# EAGLE board DRV8824%20v2.brd (2) (EAGLE 7.5.0)
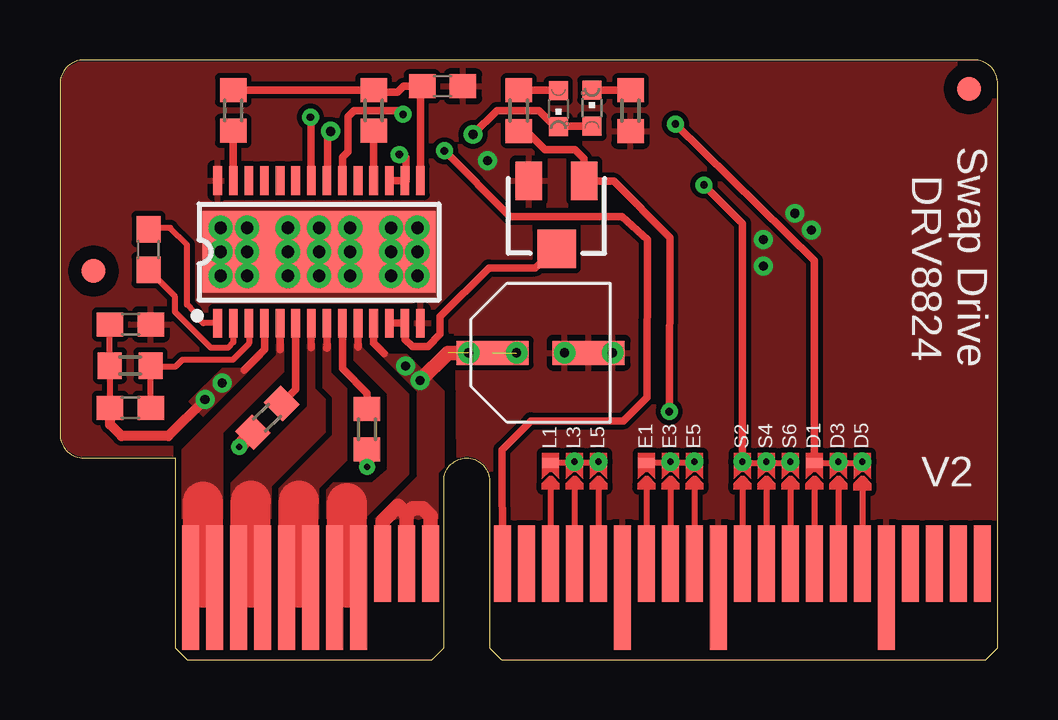
[diagram p0: board, top side]
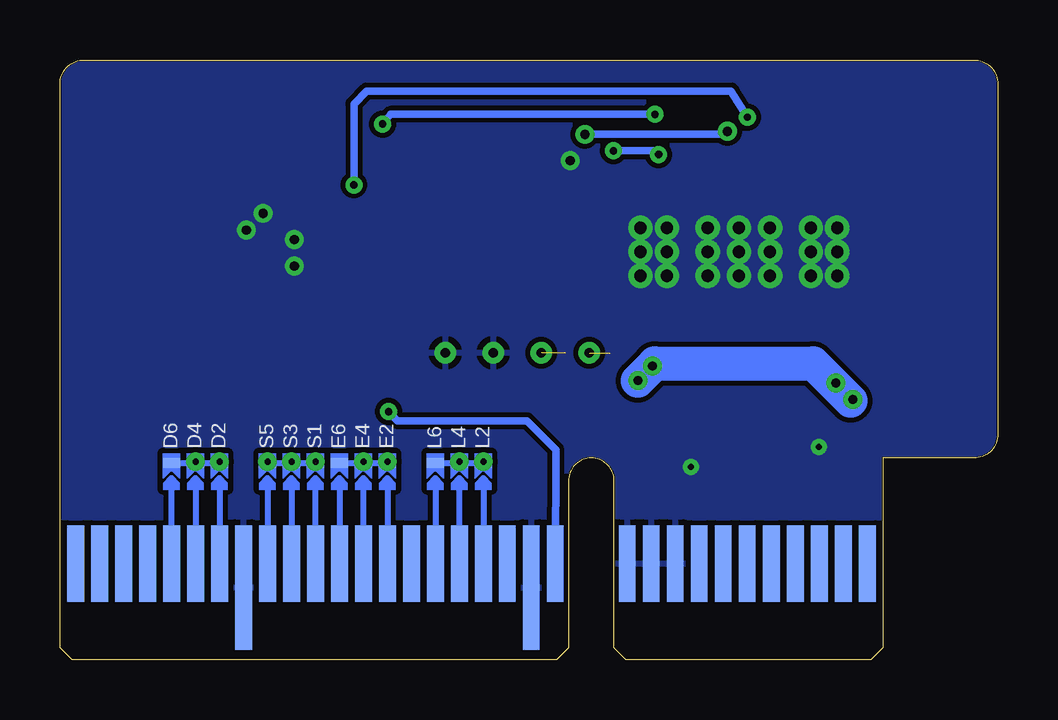
[diagram p1: board, bottom side, seen from below]

Size 39.1 x 25 mm. Coordinates in mm from the lower left corner, seen from the top.
Outline: 39.1,8.4 39.1,24 arc90 38.1,25 1,25 arc90 0,24 0,9.4 arc90 1,8.4 4.8,8.4
Copper layers (1*16): Top 0.035mm / dielectric 1.5mm / Bottom 0.035mm
Design rules "default *": minimum track width 10mil, minimum drill 24mil, track to track 8mil, track to pad 8mil, pad to pad 8mil, via to via 8mil, smd to smd 8mil, copper to edge 2mil, drill to drill 8mil, minimum pad ring 10mil, minimum via ring 8mil, stop-mask expansion 4mil, vias tented up to drill 30mil, thermal gap 10mil

## Footprints (pad centres in the part's own frame; a part is rotated, then mirrored left to right if it is on the bottom)
CHIPLED_0603 = smd 0.8 x 0.8: A 0,-0.75; C 0,0.75
C0603 = smd 1.1 x 1: 1 -0.85,0; 2 0.85,0
HTSSOP-28 = smd 0.36 x 1.19: 1 -4.225,-2.97; 2 -3.575,-2.97; 3 -2.925,-2.97; 4 -2.275,-2.97; 5 -1.625,-2.97; 6 -0.975,-2.97; 7 -0.325,-2.97; 8 0.325,-2.97; 9 0.975,-2.97; 10 1.625,-2.97; 11 2.275,-2.97; 12 2.925,-2.97; 13 3.575,-2.97; 14 4.225,-2.97; 15 4.225,2.97; 16 3.575,2.97; 17 2.925,2.97; 18 2.275,2.97; 19 1.625,2.97; 20 0.975,2.97; 21 0.325,2.97; 22 -0.325,2.97; 23 -0.975,2.97; 24 -1.625,2.97; 25 -2.275,2.97; 26 -2.925,2.97; 27 -3.575,2.97; 28 -4.225,2.97 | drill 0.508: GND@10 -4.1,1; GND@11 -4.1,0; GND@12 -4.1,-1; GND@13 -3,-1; GND@14 -3,0; GND@15 -3,1; GND@16 -1.3,1; GND@17 -1.3,0; GND@18 -1.3,-1; GND@19 0,-1; GND@20 0,0; GND@21 0,1; GND@22 1.3,1; GND@23 1.3,0; GND@24 1.3,-1; GND@25 3,-1; GND@26 3,0; GND@27 3,1; GND@28 4.1,1; GND@29 4.1,0; GND@30 4.1,-1 | smd 9.7 x 3.4: GND@PAD 0,0
R0603 = smd 1 x 1.1: 1 -0.85,0; 2 0.85,0
TRIMPOT-3MM-2 = smd 1.092 x 1.6: 1 -1.155,-1.421; 3 1.155,-1.421 | smd 1.6 x 1.6: 2 0,1.421
PCIE_64_SMART_BOARD = smd 0.7 x 3.2 bottom: GND@1 8.65,4; GND@2 9.65,4; GND@3 10.65,4; P$1 0.65,4; P$2 1.65,4; P$3 2.65,4; P$4 3.65,4; P$5 4.65,4; P$6 5.65,4; P$7 6.65,4; P$8 7.65,4; P$12 13.65,4; P$14 15.65,4; P$15 16.65,4; P$16 17.65,4; P$17 18.65,4; P$18 19.65,4; P$19 20.65,4; P$20 21.65,4; P$21 22.65,4; P$22 23.65,4; P$23 24.65,4; P$24 25.65,4; P$26 27.65,4; P$27 28.65,4; P$28 29.65,4; P$29 30.65,4; P$30 31.65,4; P$31 32.65,4; P$32 33.65,4 | smd 0.7 x 5.2 bottom: P$13 14.65,3; P$25 26.65,3 | smd 0.7 x 0.4 bottom: P$15@1 16.65,8.2; P$16@1 17.65,8.2; P$17@1 18.65,8.2; P$19@1 20.65,8.2; P$20@1 21.65,8.2; P$21@1 22.65,8.2; P$22@1 23.65,8.2; P$23@1 24.65,8.2; P$24@1 25.65,8.2; P$26@1 27.65,8.2; P$27@1 28.65,8.2; P$28@1 29.65,8.2 | smd 0.7 x 5.2: P$33 0.65,3; P$34 1.65,3; P$35 2.65,3; P$36 3.65,3; P$37 4.65,3; P$38 5.65,3; P$39 6.65,3; P$40 7.65,3; P$49 18.65,3; P$53 22.65,3; P$60 29.65,3 | drill 0.254 pad 0.305: P$41 21.65,8.25; P$42 17.65,8.25; P$43 16.65,8.25; P$65 20.65,8.25; P$66 23.65,8.25; P$67 24.65,8.25; P$68 27.65,8.25; P$69 28.65,8.25; P$70 25.65,8.25 | smd 0.7 x 3.2: P$44 13.65,4; P$45 14.65,4; P$46 15.65,4; P$47 16.65,4; P$48 17.65,4; P$50 19.65,4; P$51 20.65,4; P$52 21.65,4; P$54 23.65,4; P$55 24.65,4; P$56 25.65,4; P$57 26.65,4; P$58 27.65,4; P$59 28.65,4; P$61 30.65,4; P$62 31.65,4; P$63 32.65,4; P$64 33.65,4; VCC@1 8.65,4; VCC@2 9.65,4; VCC@3 10.65,4 | smd 0.7 x 0.4: P$46@1 15.65,8.2; P$47@1 16.65,8.2; P$48@1 17.65,8.2; P$50@1 19.65,8.2; P$51@1 20.65,8.2; P$52@1 21.65,8.2; P$54@1 23.65,8.2; P$55@1 24.65,8.2; P$56@1 25.65,8.2; P$57@1 26.65,8.2; P$58@1 27.65,8.2; P$59@1 28.65,8.2
EEEFK0J220R = smd 1 x 3: GND@1 0,-2; P$1 0,2 | drill 0.381: GND@2 0,-1; GND@3 0,-3; P$3 0,1; P$5 0,3
FIDUCIAL_1MM = smd 1 x 1: 1 0,0

## Placement (x,y rotation side)
BLU1  [CHIPLED_0603]  22.17,22.99 0 top
C3  4.7uf  [C0603]  15.95,23.9 0 top
C9  .01uf  [C0603]  3.69,17.09 90 top
C10  .1uf  [C0603]  2.94,13.98 0 top
C11  .1uf  [C0603]  2.94,10.5 0 top
DRV8824  DRV8824  [HTSSOP-28]  10.8,17 0 top
GRN1  [CHIPLED_0603]  20.78,22.96 180 top
R1  460  [R0603]  19.13,22.89 270 top
R2  10k  [R0603]  13.08,22.9 90 top
R3  10k  [R0603]  7.22,22.9 90 top
R4  .33 ohm  [R0603]  8.64,10.08 45 top
R5  .33ohm  [R0603]  12.8,9.61 90 top
R6  1m  [R0603]  2.93,12.26 0 top
R9  460  [R0603]  23.79,22.89 270 top
R22  10K  [TRIMPOT-3MM-2]  20.7,18.54 180 top
U$2  [PCIE_64_SMART_BOARD]  4.8,0 0 top
U$7  EEEFK0J220R  [EEEFK0J220R]  20.04,12.79 90 top
U$9  FIDUCIAL  [FIDUCIAL_1MM]  1.4,16.2 0 top
U$12  FIDUCIAL  [FIDUCIAL_1MM]  37.9,23.8 0 top

## Library data of the parts
BLU1 C3 C9-C11 GRN1 R1-R6 R9 U$9 U$12 = adafruit
DRV8824 U$2 U$7 = PocketNC
R22 = SparkFun-Electromechanical

## Nets
3.3V: C3.1 DRV8824.15 R2.2 R3.2
3V: R1.2 R22.1 U$2.P$12
5V: DRV8824.16 DRV8824.17 U$2.P$44
DIR: DRV8824.20 U$2.P$57@1
ENBL: BLU1.A DRV8824.21 GRN1.C
ENBL-IN: U$2.P$50@1
GND: C3.2 C10.2 DRV8824.14 DRV8824.28 DRV8824.GND@10 DRV8824.GND@11 DRV8824.GND@12 DRV8824.GND@13 DRV8824.GND@14 DRV8824.GND@15 DRV8824.GND@16 DRV8824.GND@17 DRV8824.GND@18 DRV8824.GND@19 DRV8824.GND@20 DRV8824.GND@21 DRV8824.GND@22 DRV8824.GND@23 DRV8824.GND@24 DRV8824.GND@25 DRV8824.GND@26 DRV8824.GND@27 DRV8824.GND@28 DRV8824.GND@29 DRV8824.GND@30 DRV8824.GND@PAD R4.1 R5.1 R9.2 R22.3 U$2.GND@1 U$2.GND@2 U$2.GND@3 U$2.P$13 U$2.P$25 U$2.P$49 U$2.P$53 U$2.P$60 U$7.GND@1 U$7.GND@2 U$7.GND@3
N$1: C9.2 DRV8824.1
N$2: C9.1 DRV8824.2
N$3: DRV8824.18 R2.1
N$4: DRV8824.9 R5.2
N$6: DRV8824.6 R4.2
N$9: BLU1.C R9.1
N$10: GRN1.A R1.1
N$12: DRV8824.12 DRV8824.13 R22.2
N$16: DRV8824.27 R3.1
PHASE1: DRV8824.5 U$2.P$33 U$2.P$34
PHASE2: DRV8824.7 U$2.P$35 U$2.P$36
PHASE3: DRV8824.8 U$2.P$37 U$2.P$38
PHASE4: DRV8824.10 U$2.P$39 U$2.P$40
STEP: DRV8824.22 U$2.P$22@1
VCC: C10.1 C11.1 DRV8824.4 DRV8824.11 R6.1 U$2.VCC@1 U$2.VCC@2 U$2.VCC@3 U$7.P$1 U$7.P$3 U$7.P$5
VCP: C11.2 DRV8824.3 R6.2

## Tracks (layer width: path | path; a pad name or v marks a point on that pad's centre or on a via)
3.3V
  Top 0.305: DRV8824.15 15.02,23.64 C3.1 14.32,23.9 14.07,23.65 13.18,23.65 R2.2 | 13.18,23.64 R2.2 | R2.2 R3.2
3V  (via drill 0.3)
  Top 0.305: 19.02,22.04 R1.2 19.44,22.04 20.22,21.26 21.46,21.26 21.84,20.88 21.84,19.98 R22.1 21.88,19.94 23.09,19.94 25.43,17.6 v25.4,10.34
  Bottom 0.305: U$2.P$12 18.43,8.75 19.63,9.96 25.02,9.96 v25.4,10.34
5V  (via drill 0.3)
  Top 0.305: DRV8824.17 DRV8824.16 14.43,19.92 14.43,20.93 14.3,21.06 v14.15,21.06 | U$2.P$44 18.43,8.75 19.63,9.96 23.49,9.96 24.46,10.92 24.48,17.5 23.42,18.47 18.77,18.47 v16.03,21.21
  Bottom 0.305: v16.03,21.21 14.3,21.21 v14.15,21.06
DIR  (via drill 0.3)
  Top 0.305: DRV8824.20 11.77,20.95 12.01,21.18 12.01,22.63 12.27,22.89 14.05,22.89 v14.3,22.73 | v25.65,22.33 31.45,16.63 U$2.P$57@1
  Bottom 0.305: v14.3,22.73 25.32,22.73 v25.65,22.33
ENBL  (via drill 0.38)
  Top 0.305: BLU1.A 20.78,22.24 GRN1.C 20.64,22.21 19.96,22.89 18.21,22.89 v17.22,21.9 | DRV8824.21 11.15,19.89 11.15,21.9 v11.28,22.02
  Bottom 0.305: v17.22,21.9 11.48,21.9 v11.28,22.02
GND  (via drill 0.25, 0.38)
  Top 0.305: 8.03,9.47 R4.1
  Top 0.635: v7.47,8.87 8.03,9.47 | v12.8,8.03 R5.1
  other vias: 17.83,20.8 29.33,17.5 29.33,16.4 30.63,18.6 31.33,17.9
  pour Bottom: 0,2.9 39.1,3 39.1,25 0,24.9
  pour Top: 4.6,8.4 0,8.4 0,25 39.1,25 39.13,5.19 16.68,5.09 16.68,5.77 16.65,7.5 16.63,10.89 16.56,13.67 8.9,13.7 6.52,13.68 6.57,13.21 4.6,11.31
N$1
  Top 0.254: DRV8824.1 5.97,14.03 5.6,14.4 5.6,14.5 5.3,14.8 5.3,17.3 4.6,18 3.75,18 C9.2
N$2
  Top 0.254: DRV8824.2 7.22,13.22 7,13 6.3,13 4.8,14.5 4.8,15.13 C9.1
N$3
  Top 0.305: DRV8824.18 R2.1
N$4
  Top 0.305: DRV8824.9 11.77,12.13 12.8,11.1 R5.2
N$6
  Top 0.305: DRV8824.6 9.82,11.27 R4.2
N$9
  Top 0.305: BLU1.C R9.1
N$10
  Top 0.305: R1.1 20.78,23.74 GRN1.A
N$12
  Top 0.305: DRV8824.12 DRV8824.13 14.38,13.34 14.71,13.06 15.34,13.06 15.85,13.56 15.85,14.3 17.88,16.33 19.81,16.33 R22.2
N$16
  Top 0.305: DRV8824.27 R3.1 | R3.1
PHASE1
  Top 0.305: DRV8824.5 9.18,12.94 9.17,12.93 | U$2.P$34 5.97,3
  Top 0.61: U$2.P$33 U$2.P$34
  Top 1.676: 5.97,3 5.97,6.58
  pour Top: 9.02,13.18 9.02,12.67 5.08,8.74 5.08,5.79 6.81,5.79 6.81,9.47 9.35,12.01 9.35,13.18
PHASE2
  Top 0.305: DRV8824.7 10.47,13.02 10.46,13.01 | U$2.P$36 7.95,3
  Top 0.61: U$2.P$35 7.95,3
  Top 1.676: 7.95,3 7.95,6.63
  pour Top: 10.31,13.18 10.31,10.54 7.11,7.34 7.11,5.77 8.81,5.77 8.81,7.24 11.07,9.5 11.07,10.85 10.64,11.28 10.64,13.18
PHASE3
  Top 0.305: DRV8824.8 11.12,12.98 | U$2.P$38 9.96,3
  Top 0.61: U$2.P$37 9.96,3
  Top 1.676: 9.96,3 9.96,6.63
  pour Top: 10.95,13.18 10.95,11.35 11.35,10.95 11.35,9.35 9.12,7.11 9.12,5.79 10.79,5.79 10.79,7.16 11.96,8.33 11.96,11.28 11.3,11.94 11.3,13.18
PHASE4
  Top 0.305: DRV8824.10 12.43,13.04 12.42,13.03 | U$2.P$40 11.96,3
  Top 0.61: U$2.P$39 11.96,3
  Top 1.676: 11.96,3 11.96,6.53
  pour Top: 12.24,13.21 12.24,12.5 13.64,11.1 13.64,7.9 13.03,7.39 11.38,7.37 11.1,7.06 11.1,5.79 12.8,5.79 12.8,5.99 14.55,7.75 14.55,11.05 12.6,13 12.6,13.21
STEP  (via drill 0.3)  (1 unrouted)
  Top 0.305: DRV8824.22 10.47,22.55 v10.44,22.62 | v26.85,19.79 28.45,18.18 U$2.P$22@1
  Bottom 0.305: v10.44,22.62 11.12,23.7 26.31,23.7 26.85,23.17 v26.85,19.79
VCC  (via drill 0.38)  (2 unrouted)
  Top 0.254: C11.1 R6.1 2.08,13.97 C10.1
  Top 0.305: DRV8824.11 13.07,13.19 13.51,12.75 | DRV8824.4 8.53,12.92 7.67,12.06
  Top 0.406: v6.04,10.85 4.52,9.32 2.56,9.32 2.09,9.8 C11.1
  Top 0.61: U$2.VCC@1 13.45,5.75 14.1,6.4 14.45,6.05 | U$2.VCC@2 14.45,6.05 | U$2.VCC@3 15.45,5.99 15.14,6.3 14.7,6.3 14.45,6.05 | v15.01,11.63 16.17,12.79 U$7.P$1
  Bottom 0.305: v6.04,10.85 6.09,10.79 6.15,10.79
  Bottom 1.422: v15.01,11.63 14.3,12.34 7.7,12.34 6.15,10.79
  other vias: 14.4,12.24 6.76,11.53
  pour Top: 12.9,13.23 12.9,13.18 14.88,11.2 14.88,7.62 13.11,5.84 15.72,5.84 15.77,5.89 15.77,7.8 16.03,8.05 16.03,11.18 14.48,12.73 13.74,12.73 13.23,13.23
  pour Top: 8.23,12.83 7.57,12.14 6.76,12.14 5.36,10.77 5.97,10.13 8.46,12.62 8.41,12.65
VCP
  Top 0.254: C11.2 R6.2 3.83,12.2 4.8,12.2 5.1,12.5 7.2,12.5 7.88,13.18 DRV8824.3

## Text on the board
tNames: Swap Drive | DRV8824 | V2
tValues: Pocket NC